# Altium PCB MB.PcbDoc
Units mil, origin at the board's own origin, x right, y up, seen from the top; angles counter-clockwise.
Board outline 4133.86 x 4881.89 mil, 4 copper layers (Top Layer, GND Layer, VCC Layer, Bottom Layer), stack 39.843 mil thick; 58 components, 76 nets, 347 pads, 2 vias.
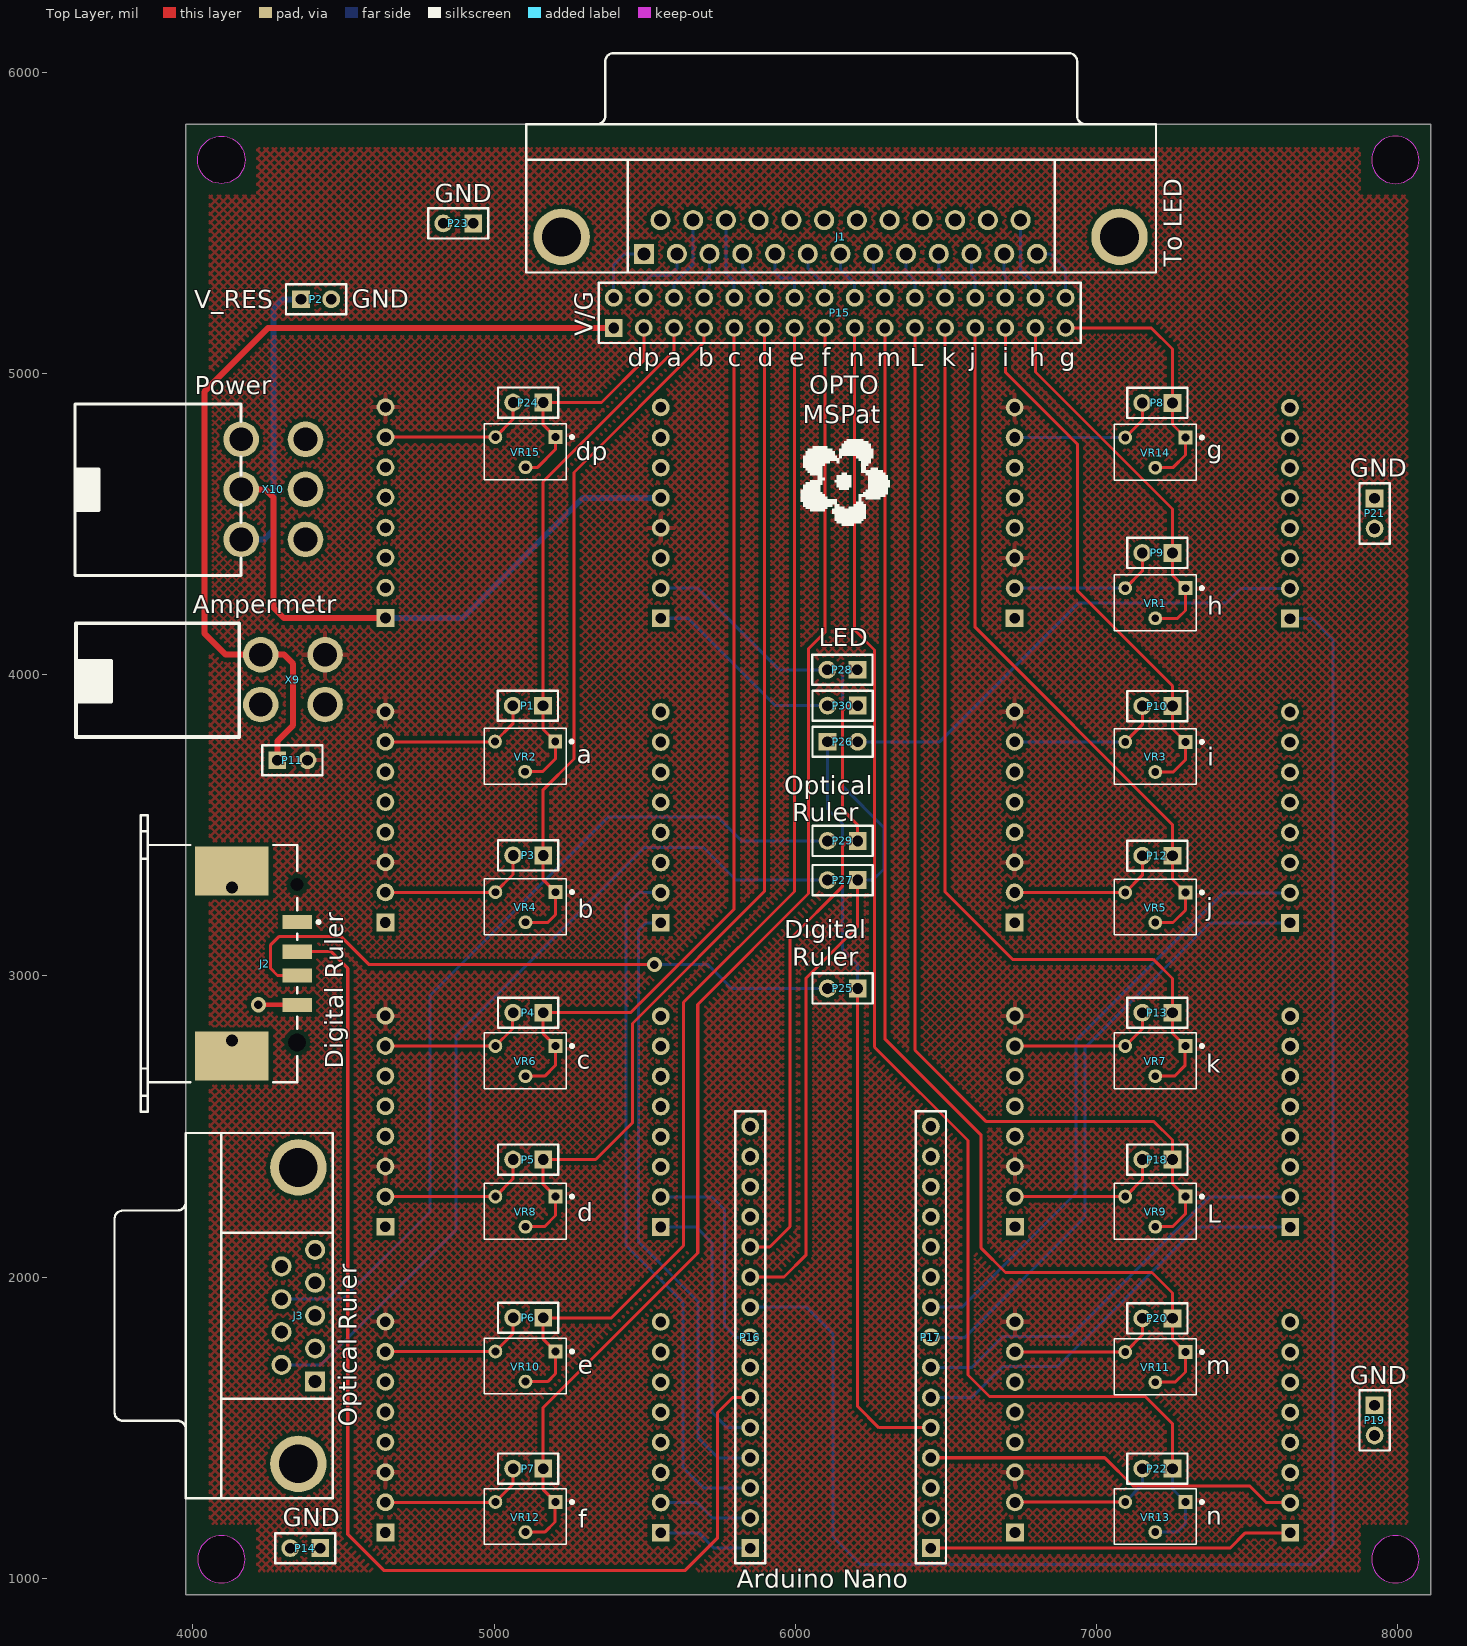
[diagram p0: Top Layer view]
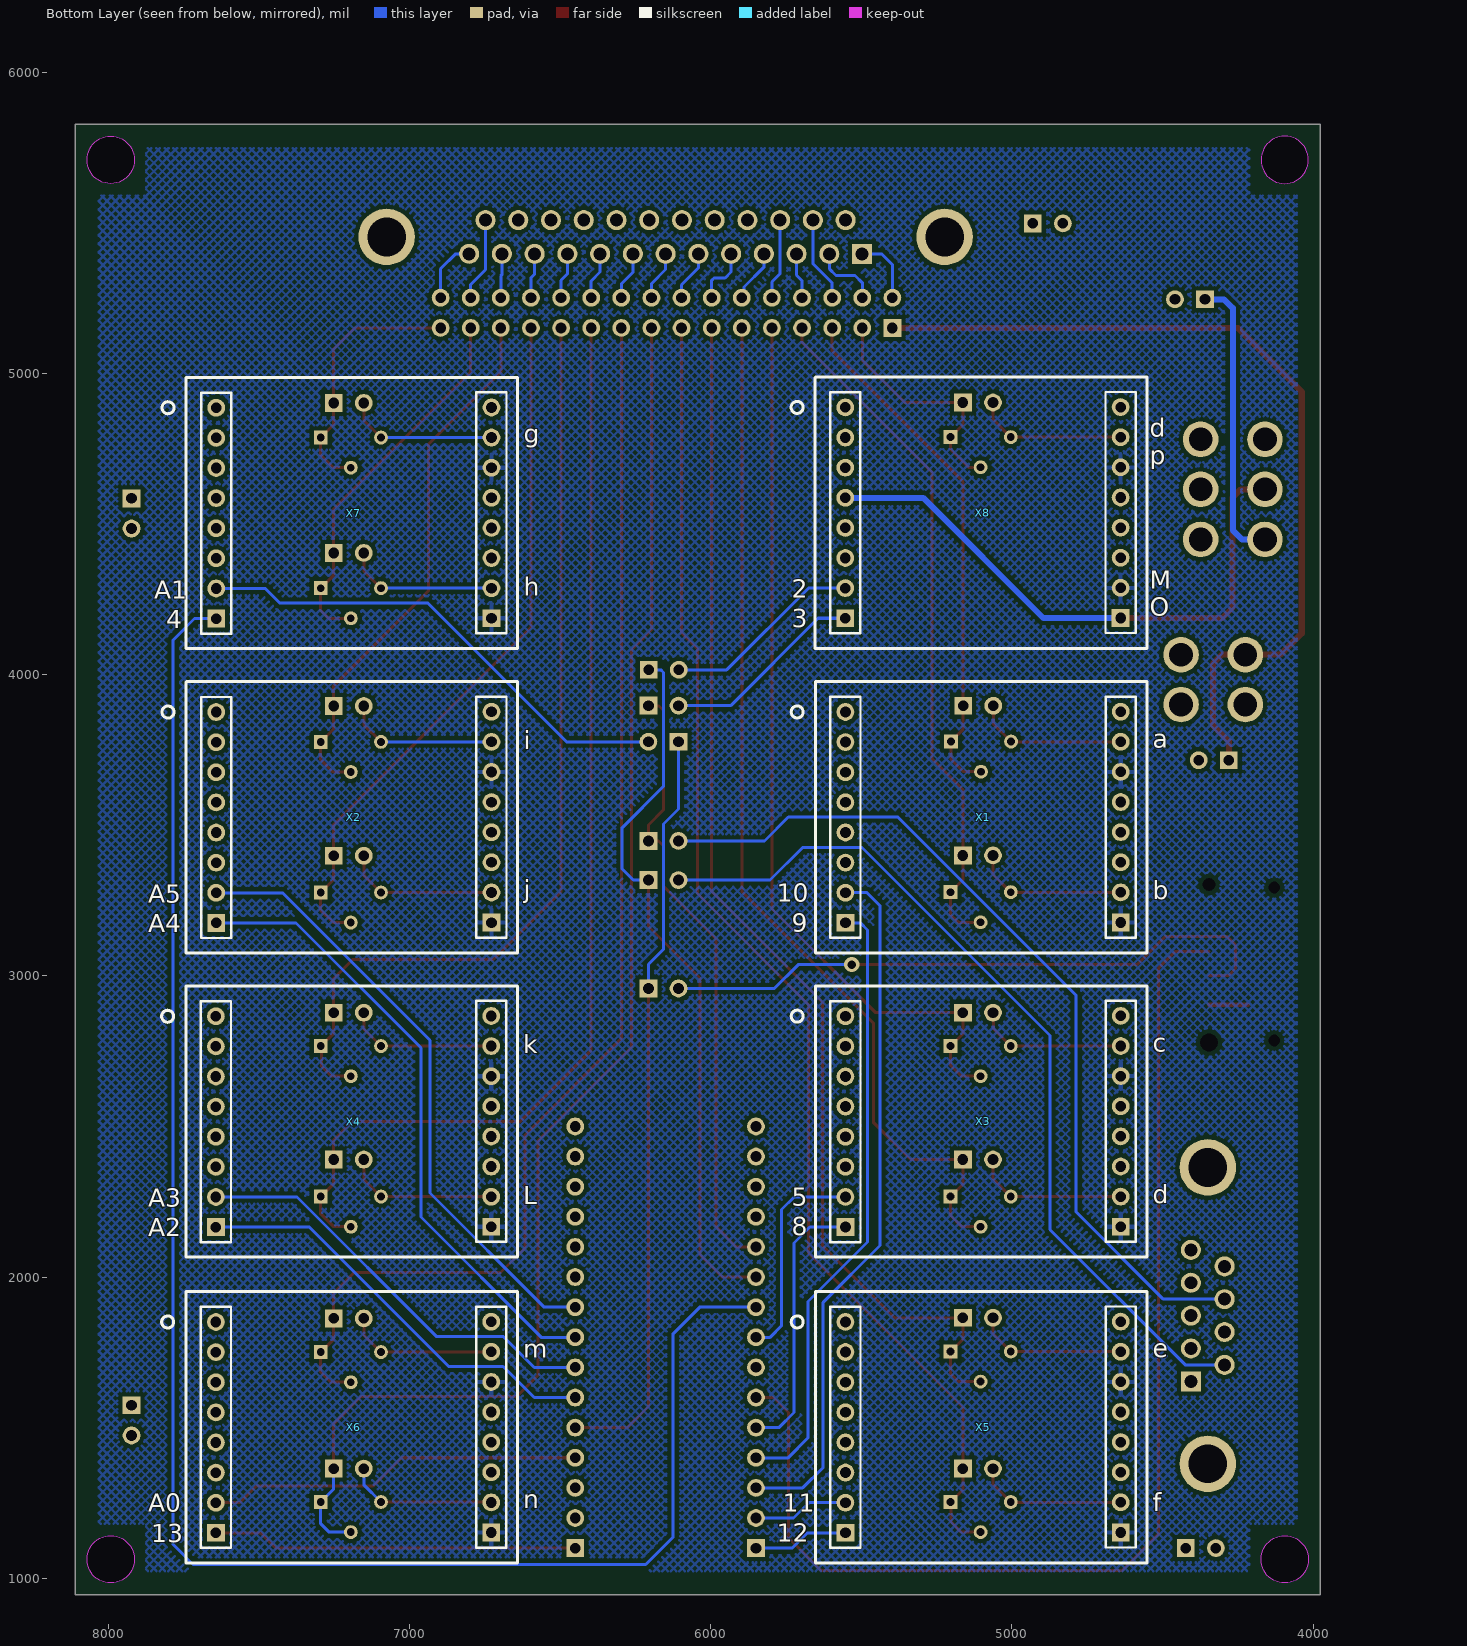
[diagram p1: Bottom Layer view, seen from below]
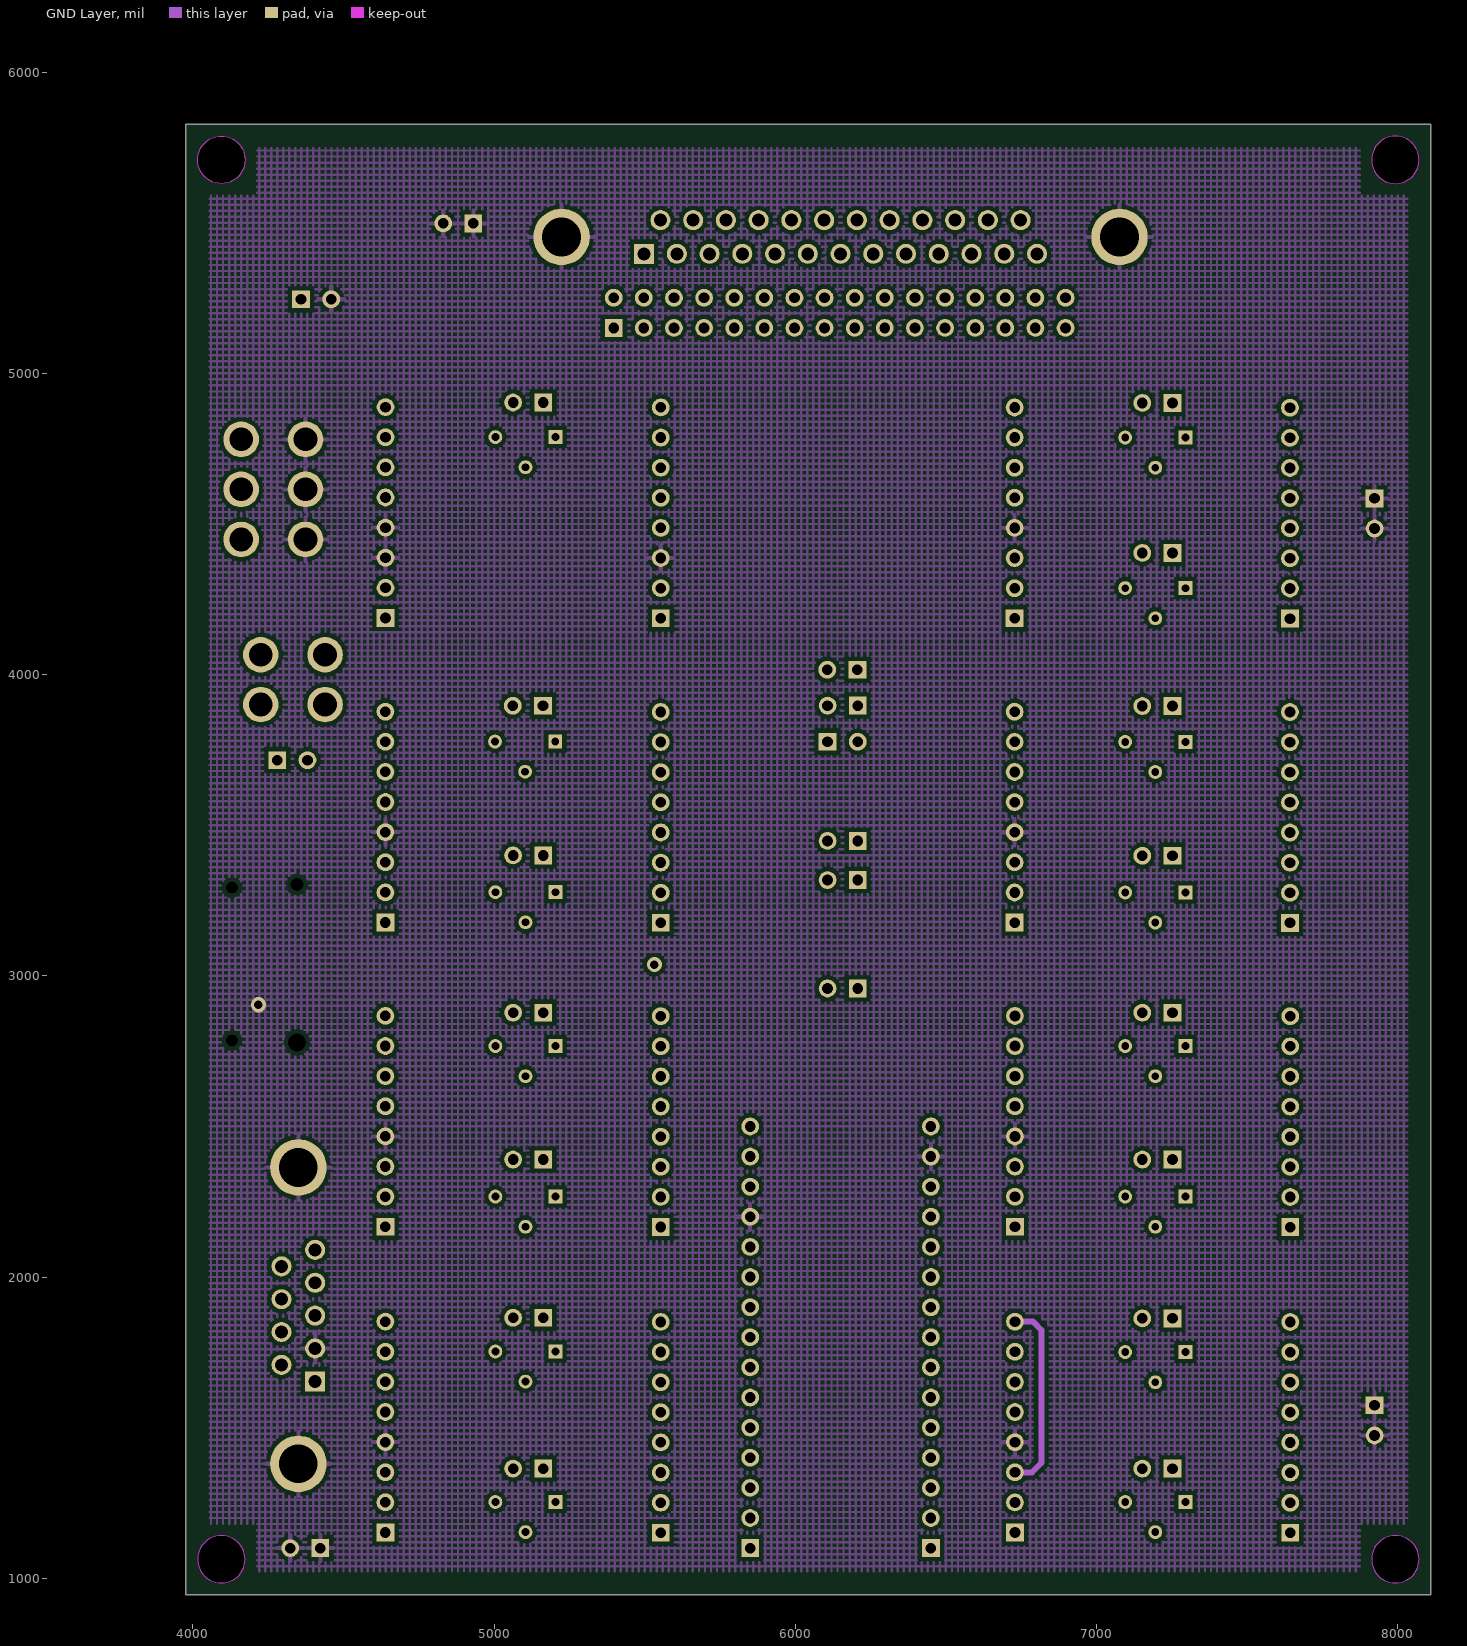
[diagram p2: GND Layer]
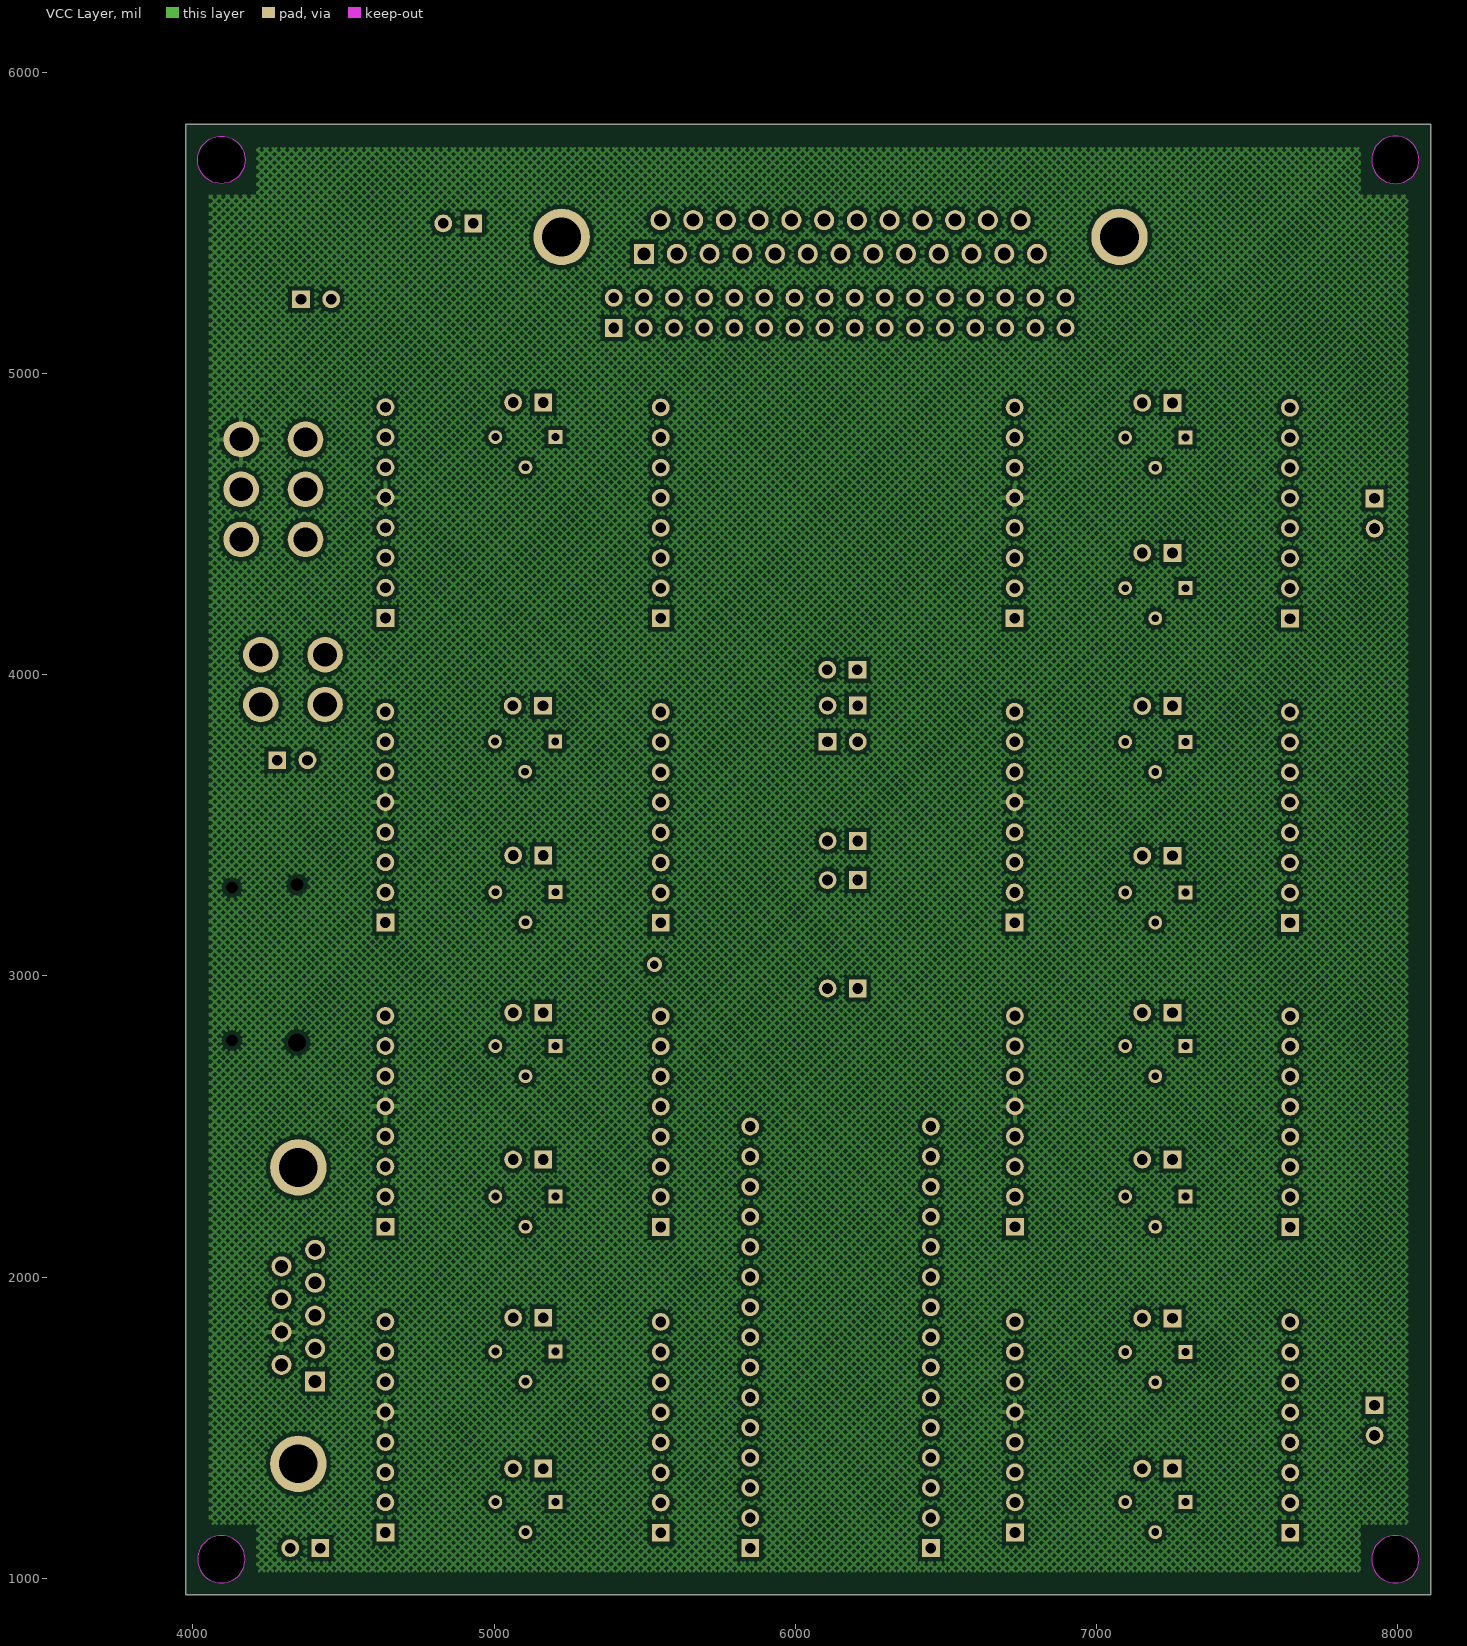
[diagram p3: VCC Layer]

## Layer stack, top to bottom
Top Solder: solder mask 1, SM-001, Dk 4
Top Layer: signal copper 0.7087
Dielectric 1: prepreg 4.5276, FR4 PR, Dk 4.2
GND Layer: signal copper 0.7087
Dielectric 2: core 27.9528, FR4 Tg150, Dk 4.6
VCC Layer: signal copper 0.7087
Dielectric 3: prepreg 4.5276, FR4 PR, Dk 4.2
Bottom Layer: signal copper 0.7087
Bottom Solder: solder mask 1, SM-001, Dk 4

## Board outline
3976.38,5826.77 8110.24,5826.77 8110.24,944.88 3976.38,944.88
cut-out: 7913.39,1062.99 ccw(c7992.13,1062.99) 7992.13,984.25 ccw(c7992.13,1062.99) 8070.87,1062.99 ccw(c7992.13,1062.99) 7992.13,1141.73 ccw(c7992.13,1062.99)
cut-out: 7913.39,5708.66 ccw(c7992.13,5708.66) 7992.13,5629.92 ccw(c7992.13,5708.66) 8070.87,5708.66 ccw(c7992.13,5708.66) 7992.13,5787.4 ccw(c7992.13,5708.66)
cut-out: 4094.49,5629.92 cw(c4094.49,5708.66) 4015.75,5708.66 cw(c4094.49,5708.66) 4094.49,5787.4 cw(c4094.49,5708.66) 4173.23,5708.66 cw(c4094.49,5708.66)
cut-out: 4015.75,1062.99 ccw(c4094.49,1062.99) 4094.49,984.25 ccw(c4094.49,1062.99) 4173.23,1062.99 ccw(c4094.49,1062.99) 4094.49,1141.73 ccw(c4094.49,1062.99)

## Design rules (kind name [scope] priority, off if disabled: settings)
AcuteAngle [All] p1: minimum=3.50000000000000E+0001 checktracksonly=FALSE
BoardOutlineClearance "BoardOutlineClearance 1" [All] p1: gap=9.84 ignorepadtopadclearanceinfootprint=FALSE except(0: Arc-SplitContinuation Track-SplitContinuation SMDPad-SplitContinuation THPad-SplitContinuation Via-SplitContinuation Fill-SplitContinuation Poly-SplitContinuation Region-SplitContinuation Text-SplitContinuation) // Milling
BoardOutlineClearance "BoardOutlineClearance 2" [All] p2: gap=15.75 ignorepadtopadclearanceinfootprint=FALSE except(0: Arc-SplitContinuation Track-SplitContinuation SMDPad-SplitContinuation THPad-SplitContinuation Via-SplitContinuation Fill-SplitContinuation Poly-SplitContinuation Region-SplitContinuation Text-SplitContinuation) // V-Cut
Clearance "Clearance 3 Oz" [All] p1: gap=13.78 ignorepadtopadclearanceinfootprint=FALSE except(9.84: Arc-Hole Track-Hole SMDPad-Hole THPad-Hole Via-Hole Fill-Hole Poly-Hole Region-Hole Text-Hole)
Clearance "Clearance 2 Oz" [All] p2: gap=11.81 ignorepadtopadclearanceinfootprint=FALSE except(9.84: Arc-Hole Track-Hole SMDPad-Hole THPad-Hole Via-Hole Fill-Hole Poly-Hole Region-Hole Text-Hole)
Clearance "Clearance-1 1 Oz" [All] p3: gap=7.87 ignorepadtopadclearanceinfootprint=FALSE except(9.84: Arc-Hole Track-Hole SMDPad-Hole THPad-Hole Via-Hole Fill-Hole Poly-Hole Region-Hole Text-Hole) // Standart
Clearance "Clearance-2 1 Oz" [All] p4: gap=5.91 ignorepadtopadclearanceinfootprint=FALSE except(7.87: Arc-Fill Arc-Poly Track-Fill Track-Poly SMDPad-Fill SMDPad-Poly THPad-Fill THPad-Poly Via-Fill Via-Poly Fill-Fill Fill-Poly Poly-Poly; 9.84: Arc-Hole Track-Hole SMDPad-Hole THPad-Hole Via-Hole Fill-Hole Poly-Hole Region-Hole Text-Hole) // Advance
Clearance "Clearance-1 1/2 Oz" [All] p5: gap=4.92 ignorepadtopadclearanceinfootprint=FALSE except(7.87: Arc-Fill Arc-Poly Track-Fill Track-Poly SMDPad-SMDPad SMDPad-Fill SMDPad-Poly THPad-Fill THPad-Poly Via-Fill Via-Poly Fill-Fill Fill-Poly Poly-Poly Poly-Region Poly-Text; 9.84: Arc-Hole Track-Hole SMDPad-Hole THPad-Hole Via-Hole Fill-Hole Poly-Hole Region-Hole Text-Hole) // Standart
Clearance "Clearance-2 1/2 Oz" [All] p6: gap=3.94 ignorepadtopadclearanceinfootprint=FALSE except(5.91: Arc-Fill Arc-Poly Track-Fill Track-Poly SMDPad-SMDPad SMDPad-Fill SMDPad-Poly THPad-Fill THPad-Poly Via-Fill Via-Poly Fill-Fill Fill-Poly Poly-Poly Poly-Region Poly-Text; 9.84: Arc-Hole Track-Hole SMDPad-Hole THPad-Hole Via-Hole Fill-Hole Poly-Hole Region-Hole Text-Hole) // Advance
DiffPairsRouting "DiffPairsRouting 1 Oz" [All] p1: maxlimit=10 minlimit=7.87 mostfreqgap=10 toplayer_minwidth=7.87 toplayer_maxwidth=15 toplayer_prefwidth=15 midlayer1_minwidth=7.87 midlayer1_maxwidth=15 midlayer1_prefwidth=15 midlayer2_minwidth=7.87 midlayer2_maxwidth=15 midlayer2_prefwidth=15 bottomlayer_minwidth=7.87 bottomlayer_maxwidth=15 bottomlayer_prefwidth=15 maxuncoupledlength=500
DiffPairsRouting "DiffPairsRouting 1/2 Oz" [All] p2: maxlimit=10 minlimit=3.94 mostfreqgap=10 toplayer_minwidth=3.94 toplayer_maxwidth=15 toplayer_prefwidth=15 midlayer1_minwidth=3.94 midlayer1_maxwidth=15 midlayer1_prefwidth=15 midlayer2_minwidth=3.94 midlayer2_maxwidth=15 midlayer2_prefwidth=15 bottomlayer_minwidth=3.94 bottomlayer_maxwidth=15 bottomlayer_prefwidth=15 maxuncoupledlength=500
HoleSize "Minimum HoleSize" [IsPad] p1: absolutevalues=TRUE maxlimit=232.28 minlimit=23.62 maxpercent=80.000 minpercent=20.000
HoleSize "Minimum HoleSize VIA 1" [IsVia] p2: absolutevalues=TRUE maxlimit=232.28 minlimit=11.81 maxpercent=80.000 minpercent=20.000 // Standart
HoleSize "Minimum HoleSize VIA 2" [IsVia] p3: absolutevalues=TRUE maxlimit=232.28 minlimit=7.87 maxpercent=80.000 minpercent=20.000 // Advance
HoleToHoleClearance Hole2HoleClearance [All] p1: gap=9.84 allowstackedmicrovias=FALSE
MinimumAnnularRing "Minimum AR VIA Standart" [IsVia] p1: minimumring=5.91
MinimumAnnularRing "Minimum AR PAD Standart" [IsPAD] p2: minimumring=7.87
MinimumAnnularRing "Minimum AR VIA Advance" [IsVia] p3: minimumring=3.94
MinimumAnnularRing "Minimum AR PAD Advance" [IsPAD] p4: minimumring=5.91
MinimumSolderMaskSliver "SolderMask Bridge Standart" [All] p1: minsoldermaskwidth=5.91 // All Masks
MinimumSolderMaskSliver "SolderMask Bridge Advance" [All] p2: minsoldermaskwidth=3.94 // Mask LDI
PlaneClearance "PlaneClearance 3 Oz" [All] p1: clearance=13.78
PlaneClearance "PlaneClearance 2 Oz" [All] p2: clearance=11.81
PlaneClearance "PlaneClearance 1 Oz" [All] p3: clearance=7.87
PlaneClearance "PlaneClearance-1 1/2 Oz" [All] p4: clearance=7.87 // Standart
PlaneClearance "PlaneClearance-2 1/2 Oz" [All] p5: clearance=5.91 // Advance
PlaneConnect "TermalConnect 3 Oz" [All] p1: planeconnectstyle=Relief reliefexpansion=7.87 reliefentries=4 reliefconductorwidth=13.78 reliefairgap=13.78 // Standart
PlaneConnect "TermalConnect 2 Oz" [All] p2: planeconnectstyle=Relief reliefexpansion=7.87 reliefentries=4 reliefconductorwidth=11.81 reliefairgap=11.81 // Standart
PlaneConnect "TermalConnect-1 1 Oz" [All] p3: planeconnectstyle=Relief reliefexpansion=7.87 reliefentries=4 reliefconductorwidth=7.87 reliefairgap=7.87 // Standart
PlaneConnect "TermalConnect-2 1 Oz" [All] p4: pad.planeconnectstyle=Relief pad.reliefexpansion=5.91 pad.reliefentries=4 pad.reliefconductorwidth=7.87 pad.reliefairgap=7.87 via.planeconnectstyle=Direct via.reliefexpansion=5.91 via.reliefentries=4 via.reliefconductorwidth=5.91 via.reliefairgap=5.91 // Advance
PlaneConnect "TermalConnect-1 1/2 Oz" [All] p5: planeconnectstyle=Relief reliefexpansion=7.87 reliefentries=4 reliefconductorwidth=7.87 reliefairgap=7.87 // Standart
PlaneConnect "TermalConnect-2 1/2 Oz" [All] p6: pad.planeconnectstyle=Relief pad.reliefexpansion=5.91 pad.reliefentries=4 pad.reliefconductorwidth=5.91 pad.reliefairgap=5.91 via.planeconnectstyle=Direct via.reliefexpansion=5.91 via.reliefentries=4 via.reliefconductorwidth=5.91 via.reliefairgap=5.91 // Advance
PolygonConnect "PolygonConnect 3 Oz" [All] p1: thpad.connectstyle=Relief thpad.reliefconductorwidth=13.78 thpad.reliefentries=4 thpad.polygonreliefangle="90 Angle" thpad.airgapwidth=13.78 smdpad.connectstyle=Relief smdpad.reliefconductorwidth=13.78 smdpad.reliefentries=4 smdpad.polygonreliefangle="90 Angle" smdpad.airgapwidth=13.78 via.connectstyle=Direct via.reliefconductorwidth=10 via.reliefentries=4 via.polygonreliefangle="90 Angle" via.airgapwidth=10
PolygonConnect "PolygonConnect 2 Oz" [All] p2: thpad.connectstyle=Relief thpad.reliefconductorwidth=11.81 thpad.reliefentries=4 thpad.polygonreliefangle="90 Angle" thpad.airgapwidth=11.81 smdpad.connectstyle=Relief smdpad.reliefconductorwidth=11.81 smdpad.reliefentries=4 smdpad.polygonreliefangle="90 Angle" smdpad.airgapwidth=11.81 via.connectstyle=Direct via.reliefconductorwidth=10 via.reliefentries=4 via.polygonreliefangle="90 Angle" via.airgapwidth=10
PolygonConnect "PolygonConnect-1 1 Oz" [All] p3: thpad.connectstyle=Relief thpad.reliefconductorwidth=7.87 thpad.reliefentries=4 thpad.polygonreliefangle="90 Angle" thpad.airgapwidth=7.87 smdpad.connectstyle=Relief smdpad.reliefconductorwidth=7.87 smdpad.reliefentries=4 smdpad.polygonreliefangle="90 Angle" smdpad.airgapwidth=7.87 via.connectstyle=Direct via.reliefconductorwidth=10 via.reliefentries=4 via.polygonreliefangle="90 Angle" via.airgapwidth=10 // Standart
PolygonConnect "PolygonConnect-2 1 Oz" [All] p4: thpad.connectstyle=Relief thpad.reliefconductorwidth=5.91 thpad.reliefentries=4 thpad.polygonreliefangle="90 Angle" thpad.airgapwidth=5.91 smdpad.connectstyle=Relief smdpad.reliefconductorwidth=5.91 smdpad.reliefentries=4 smdpad.polygonreliefangle="90 Angle" smdpad.airgapwidth=5.91 via.connectstyle=Direct via.reliefconductorwidth=10 via.reliefentries=4 via.polygonreliefangle="90 Angle" via.airgapwidth=10 // Advance
PolygonConnect "PolygonConnect-1 1/2 Oz" [All] p5: thpad.connectstyle=Relief thpad.reliefconductorwidth=5.91 thpad.reliefentries=4 thpad.polygonreliefangle="90 Angle" thpad.airgapwidth=7.87 smdpad.connectstyle=Relief smdpad.reliefconductorwidth=7.87 smdpad.reliefentries=4 smdpad.polygonreliefangle="90 Angle" smdpad.airgapwidth=7.87 via.connectstyle=Direct via.reliefconductorwidth=10 via.reliefentries=4 via.polygonreliefangle="90 Angle" via.airgapwidth=10 // Standart
PolygonConnect "PolygonConnect-2 1/2 Oz" [All] p6: thpad.connectstyle=Relief thpad.reliefconductorwidth=4.92 thpad.reliefentries=4 thpad.polygonreliefangle="90 Angle" thpad.airgapwidth=5.91 smdpad.connectstyle=Relief smdpad.reliefconductorwidth=4.92 smdpad.reliefentries=4 smdpad.polygonreliefangle="90 Angle" smdpad.airgapwidth=5.91 via.connectstyle=Direct via.reliefconductorwidth=10 via.reliefentries=4 via.polygonreliefangle="90 Angle" via.airgapwidth=10 // Advance
RoutingCorners [All] p1 off: cornerstyle=45-Degree minsetback=100 maxsetback=100
RoutingVias [All] p1: holewidth=11.81 width=23.62 viastyle="Through Hole" minholewidth=7.87 minwidth=15.75 maxholewidth=232.28 maxwidth=251.97
SilkToSilkClearance Silk2SilkClearance [All] p1 off: silktosilkclearance=5.91
SilkToSolderMaskClearance Silk2SolderMaskClearance [IsPad] p1 off: minsilkscreentomaskgap=5.91 clearancetoexposedcopper=TRUE
SolderMaskExpansion SolderMaskExpansion-1 [All] p1: expansion=1.97 istentingtop=FALSE // Standart
SolderMaskExpansion "SolderMaskExpansion LDI" [All] p2: expansion=0.98 istentingtop=FALSE // Advance
UnRoutedNet [All] p1: checkbadconnections=TRUE
Width "Width 3 Oz" [All] p1: maxlimit=20 minlimit=10 preferedwidth=10 checkconnectedcopper=TRUE
Width "Width 2 Oz" [All] p2: maxlimit=393.7 minlimit=10 preferedwidth=10 minimp=50.000000 maximp=50.000000 favimp=50.000000 checkconnectedcopper=TRUE
Width "Width 1 Oz" [All] p3: maxlimit=20 minlimit=10 preferedwidth=10 checkconnectedcopper=TRUE
Width "Width 1/2 Oz" [All] p4: maxlimit=20 minlimit=10 preferedwidth=10 checkconnectedcopper=TRUE
20 further rules are at their usual default settings.

## Components (designator, comment, footprint, x,y, rotation, side; value= is the part's Value field where it differs from the comment)
J1 "D Connector 25" DSUB1.385-2H25A 6150,5827 r0 top
J2 "1-353576-1" 353576 3849.94,3040.8 r180 top
J3 "D Connector 9" DSUB1.385-2H9 3975.98,1871.93 r90 top
P1 "Header 2" HDR1X2 5162,3896.75 r180 top
P2 "Header 2" HDR1X2 4359,5246 r0 top
P3 "Header 2" HDR1X2 5163,3399.75 r180 top
P4 "Header 2" HDR1X2 5163,2877.75 r180 top
P5 "Header 2" HDR1X2 5163,2390 r180 top
P6 "GND" HDR1X2 5163,1864.75 r180 top
P7 "GND" HDR1X2 5163,1364 r180 top
P8 "GND" HDR1X2 7252,4902 r180 top
P9 "GND" HDR1X2 7252,4404 r180 top
P10 "Header 2" HDR1X2 7252,3895.75 r180 top
P11 "Header 2" HDR1X2 4280.18,3716 r0 top
P12 "Header 2" HDR1X2 7252,3398.75 r180 top
P13 "GND" HDR1X2 7252,2877.75 r180 top
P14 "GND" HDR1X2 4423,1100 r180 top
P15 "Header 16X2" HDR2X16 5397,5151 r0 top
P16 "Header 15" HDR1X15 5850,1100 r90 top
P17 "Header 15" HDR1X15 6450,1100 r90 top
P18 "GND" HDR1X2 7252,2390 r180 top
P19 "GND" HDR1X2 7923,1574 r270 top
P20 "GND" HDR1X2 7252,1862.75 r180 top
P21 "GND" HDR1X2 7923,4585 r270 top
P22 "GND" HDR1X2 7252,1364 r180 top
P23 "GND" HDR1X2 4931,5498 r180 top
P24 "GND" HDR1X2 5163,4903.37 r180 top
P25 "Digit_rul" HDR1X2 6207,2958 r180 top
P26 "Relay" HDR1X2 6107,3777 r0 top
P27 "Optic_rul" HDR1X2 6207,3317.86 r180 top
P28 "Relay" HDR1X2 6206,4016 r180 top
P29 "Optic_ruler" HDR1X2 6207,3447.86 r180 top
P30 "Relay" HDR1X2 6207,3897 r180 top
VR1 "RES 3266W" "RES 3266W" 7295,4287 r180 top
VR2 "RES 3266W" "RES 3266W" 5203,3777.75 r180 top
VR3 "RES 3266W" "RES 3266W" 7295,3776.75 r180 top
VR4 "RES 3266W" "RES 3266W" 5204,3277.75 r180 top
VR5 "RES 3266W" "RES 3266W" 7295,3276.75 r180 top
VR6 "RES 3266W" "RES 3266W" 5204,2766.75 r180 top
VR7 "RES 3266W" "RES 3266W" 7295,2766.75 r180 top
VR8 "RES 3266W" "RES 3266W" 5204,2267 r180 top
VR9 "RES 3266W" "RES 3266W" 7295,2267 r180 top
VR10 "RES 3266W" "RES 3266W" 5204,1752.75 r180 top
VR11 "RES 3266W" "RES 3266W" 7295,1750.75 r180 top
VR12 "RES 3266W" "RES 3266W" 5204,1253 r180 top
VR13 "RES 3266W" "RES 3266W" 7295,1253 r180 top
VR14 "RES 3266W" "RES 3266W" 7295,4787 r180 top
VR15 "RES 3266W" "RES 3266W" 5204,4788.37 r180 top
X1 "MEZ_RELAY" MEZ_RELAY 5553,3876 r180 bottom
X2 "MEZ_RELAY" MEZ_RELAY 7642,3875.75 r180 bottom
X3 "MEZ_RELAY" MEZ_RELAY 5553,2866 r180 bottom
X4 "MEZ_RELAY" MEZ_RELAY 7643,2865.75 r180 bottom
X5 "MEZ_RELAY" MEZ_RELAY 5553,1851 r180 bottom
X6 "MEZ_RELAY" MEZ_RELAY 7643,1850.75 r180 bottom
X7 "MEZ_RELAY" MEZ_RELAY 7642,4886 r180 bottom
X8 "MEZ_RELAY" MEZ_RELAY 5553.36,4887.11 r180 bottom
X9 "Ampermetr" AMP_VOLTMETER 4438.69,4066 r270 top
X10 "Power" POWER 4160.18,4781 r90 top

## Footprints (in the part's own frame and the unit in brackets; to place one, negate y for a bottom-side part, rotate by r counter-clockwise, add the part's x,y. Pads: shape width x height; smd on the part's side, far side on the other; paste and mask are expansions set on the pad)
353576 [mm] "Connector; USB1.1, Type A, SM; 4 Position; Right Angle"
  rect 2.5x1.2 smd: 1(-12.6,-3.5) 2(-12.6,-1) 3(-12.6,1) 4(-12.6,3.5)
  rect 6.2x4.1 smd: 5(-7.1,7.8) 6(-7.1,-7.8)
  round 0.7 hole 1 unplated: MH1(-7.1,6.496) MH2(-7.1,-6.404)
  round 1.2 hole 1.5 unplated: MH3(-12.6,6.65)
  round 0.8 hole 1.1 unplated: MH4(-12.6,-6.65)
  silkscreen extent -14.53,-12.5 0.6,12.5
AMP_VOLTMETER [mm] "AMP_VOLTMETER"
  round 3 hole 2: 1(0,0) 2(0,-5.423) 3(4.2,-5.423) 4(4.2,0)
  silkscreen extent -2.66,-21 6.94,-7.25
DSUB1.385-2H9 [mm] "Connector; D Subminiature; 9 Position; Right Angle; Pitch 1.385 mm"
  rect 1.69x1.69 hole 1.09: 1(-5.54,-10.92)
  round 1.69 hole 1.09: 2(-2.77,-10.92) 3(0,-10.92) 4(2.77,-10.92) 5(5.54,-10.92) 6(-4.155,-8.08) 8(1.385,-8.08) 9(4.155,-8.08)
  round 1.69 hole 1.09 mask+0.102: 7(-1.385,-8.08)
  round 4.76 hole 3.26: 10(-12.495,-9.5) 11(12.495,-9.5)
  silkscreen extent -15.4,-12.4 15.4,6
DSUB1.385-2H25A [mm] "Connector; D Subminiature; 25 Position; Right Angle; Pitch 1.385 mm"
  rect 1.69x1.69 hole 1.09: 1(-16.566,-10.92)
  round 1.69 hole 1.09: 2(-13.805,-10.92) 3(-11.044,-10.92) 4(-8.283,-10.92) 5(-5.522,-10.92) 6(-2.761,-10.92) 7(0,-10.92) 8(2.761,-10.92) 9(5.522,-10.92) 10(8.283,-10.92) 11(11.044,-10.92) 12(13.805,-10.92) 13(16.566,-10.92) 14(-15.185,-8.08) 15(-12.424,-8.08) 16(-9.663,-8.08) 17(-6.902,-8.08) 18(-4.141,-8.08) 19(-1.38,-8.08) 20(1.381,-8.08) 21(4.142,-8.08) 22(6.903,-8.08) 23(9.664,-8.08) 24(12.425,-8.08) 25(15.186,-8.08)
  round 4.76 hole 3.26: 26(-23.526,-9.5) 27(23.526,-9.5)
  silkscreen extent -26.5,-12.5 26.6,6
HDR1X2 [mm] "Connector; Header; 2 Position"
  rect 1.5x1.5 hole 0.9: 1(0,0)
  round 1.5 hole 0.9: 2(2.54,0)
  silkscreen extent -1.27,-1.27 3.81,1.27
HDR1X15 [mm] "Connector; Header; 15 Position"
  rect 1.5x1.5 hole 0.9: 1(0,0)
  round 1.5 hole 0.9: 2(2.54,0) 3(5.08,0) 4(7.62,0) 5(10.16,0) 6(12.7,0) 7(15.24,0) 8(17.78,0) 9(20.32,0) 10(22.86,0) 11(25.4,0) 12(27.94,0) 13(30.48,0) 14(33.02,0) 15(35.56,0)
  silkscreen extent -1.27,-1.27 36.83,1.27
HDR2X16 [mm] "Connector; Header; 16x2 Position"
  rect 1.5x1.5 hole 0.9: 1(0,0)
  round 1.5 hole 0.9: 2(0,2.54) 3(2.54,0) 4(2.54,2.54) 5(5.08,0) 6(5.08,2.54) 7(7.62,0) 8(7.62,2.54) 9(10.16,0) 10(10.16,2.54) 11(12.7,0) 12(12.7,2.54) 13(15.24,0) 14(15.24,2.54) 15(17.78,0) 16(17.78,2.54) 17(20.32,0) 18(20.32,2.54) 19(22.86,0) 20(22.86,2.54) 21(25.4,0) 22(25.4,2.54) 23(27.94,0) 24(27.94,2.54) 25(30.48,0) 26(30.48,2.54) 27(33.02,0) 28(33.02,2.54) 29(35.56,0) 30(35.56,2.54) 31(38.1,0) 32(38.1,2.54)
  silkscreen extent -1.27,-1.27 39.37,3.81
MEZ_RELAY [mm] "мезонин реле"
  round 1.5 hole 0.9: 1(0,0) 2(0,-2.54) 3(0,-5.08) 4(0,-7.62) 5(0,-10.16) 6(0,-12.7) 7(0,-15.24) 10(23.216,-15.215) 11(23.216,-12.675) 12(23.216,-10.135) 14(23.216,-5.055) 15(23.216,-2.515) 16(23.216,0.025)
  rect 1.5x1.5 hole 0.9: 8(0,-17.78) 9(23.216,-17.755)
  round 1.5 hole 0.9 mask+0.102: 13(23.216,-7.595)
  silkscreen extent -4.57,-20.32 25.43,2.57
POWER [mm] "POWER"
  round 3 hole 2 mask+0.102: 1(0,0)
  round 3 hole 2: 2(-4.217,0) 3(-8.435,0) 4(0,-5.422) 5(-4.217,-5.422) 6(-8.435,-5.422)
  silkscreen extent -11.5,0 3,14
"RES 3266W" [mm]
  rect 1.168x1.168 hole 0.66: 1(0,0)
  round 1.168 hole 0.66: 2(2.54,2.54) 3(5.08,0)
  silkscreen extent -1.49,-1.12 5.99,3.58

## Part data
J1: "Receptacle Assembly, 25 Position, Right Angle", PackageDocument=U, DatasheetDocument=19-Mar-1999, Gender=Receptacle, LatestRevisionDate=17-Jul-2002, LatestRevisionNote="Re-released for DXP Platform.", Orientation="Right Angle", PackageReference=787202, Positions=25, Published=15-Jun-2001, Publisher="Altium Limited"
J2: "USB 1.1, Right Angle, SMT, A Type, Receptacle, 4 Position, White", PackageDocument=11-Apr-2003, ComponentLink1Description="Manufacturer Link", ComponentLink1URL=http://www.tycoelectronics.com/, ComponentLink2Description="Packaging Specification", ComponentLink2URL=http://ecommas.tycoelectronics.com/commerce/DocumentDelivery/DDEController?Action=showdoc&DocId=Customer+Drawing%7F353576%7FD%7Ftif%7FJapanese%7FJPN_CD_353576_D.tif, ContactMaterial="Copper Alloy", ContactPlating="Gold over Palladium Nickel", DatasheetDocument=11-Apr-2003, DrillSize="Corresponds to nominal value.", HousingMaterial=Thermoplastic, PackageReference=353576, PanelGround=Without, PCB_Layout="Complies with manufacturer's recommendation.", Published=15-Jul-2004, Publisher="Altium Limited"
J3: "Receptacle Assembly, 9 Position, Right Angle", PackageDocument=O, DatasheetDocument=1-Sep-1999, Gender=Receptacle, LatestRevisionDate=17-Jul-2002, LatestRevisionNote="Re-released for DXP Platform.", Orientation="Right Angle", PackageReference=788750, Positions=9, Published=15-Jun-2001, Publisher="Altium Limited"
P1 P2 P3 P4 P5 P10 P11 P12: "Header, 2-Pin", LatestRevisionDate=17-Jul-2002, LatestRevisionNote="Re-released for DXP Platform.", Publisher="Altium Limited"
P6 P7 P8 P9 P13 P14 P18 P19 P20 P21 P22 P23 P24 P25 P26 P27 P28 P29 P30: library part "Header 2", "Header, 2-Pin", LatestRevisionDate=17-Jul-2002, LatestRevisionNote="Re-released for DXP Platform.", Publisher="Altium Limited"
P15: "Header, 16-Pin, Dual row", LatestRevisionDate=17-Jul-2002, LatestRevisionNote="Re-released for DXP Platform.", Publisher="Altium Limited"
P16 P17: "Header, 15-Pin", LatestRevisionDate=17-Jul-2002, LatestRevisionNote="Re-released for DXP Platform.", Publisher="Altium Limited"
X9: library part AMP_VOLTMETR
X10: library part POWER

## Via types
v1: diameter 50, hole 28, Top Layer to Bottom Layer, 1 vias
v2: diameter 50, hole 28, Top Layer to GND Layer, 1 vias

## Nets (pads, with @x,y where several pads share a name; then routed paths per layer and width w, separated by ;. In a path a pad name is that pad's centre, name@x,y a point inside that pad or via, vN(x,y) a via of type N, cw(c..) or ccw(c..) an arc to the next point about the centre after c; other vN are vias at no path point)
a: P1.2 VR2.3 X1.15 | length 507.4
  Top Layer w10: X1.15 VR2.3@5003,3777 ; VR2.3 5062,3836.75 P1.2
A0: P17.4 X6.7 | length 1254.9
  Top Layer w10: P17.4 6450.06,1400.06 7026.94,1400.06 7121,1306 7509,1306 7564.25,1250.75 X6.7
A1: P17.5 P25.1 P26.1 | length 2520.4
  Top Layer w10: P25.1 6207,1570 6277,1500 P17.5
  Bottom Layer w10: P26.1 6107,3554 6157,3504 6157,3088 6207,3038 P25.1
A1_relay: P26.2 X7.7 | length 1645.8
  Bottom Layer w10: P26.2 6479,3777 6939,4237 7430,4237 7479,4286 X7.7
A1_ruler: J2.3 P25.2 | length 2107.8
  Top Layer w10: J2.3 4280.57,3001.43 4258,3024 4258,3103 4285,3130 4492,3130 4585,3037 v1(5532,3037)
  Bottom Layer w10: v1(5532,3037) 5710,3037 5789,2958 P25.2
A2: P17.6 X4.8 | length 1427.3
  Bottom Layer w10: P17.6 6586,1600 6689,1703 6870,1703 7332.75,2165.75 X4.8
A3: P17.7 X4.7 | length 1427.3
  Bottom Layer w10: P17.7 6586,1700 6688,1802 6910,1802 7373.75,2265.75 X4.7
A4: P17.8 X2.8 | length 2091.1
  Bottom Layer w10: P17.8 6563,1800 6962,2199 6962,2761 7376.75,3175.75 X2.8
A5: P17.9 X2.7 | length 2058.8
  Bottom Layer w10: P17.9 6553,1900 6932,2279 6932,2786 7421.75,3275.75 X2.7
a_00: J1.15 P15.6 | length 284.3
  Bottom Layer w10: P15.6 5597,5300 5660.85,5363.85 J1.15
a_0: P1.1 P15.5 VR2.1 VR2.2 | length 1745.7
  Top Layer w10: VR2.2 5160.75,3677.75 5203,3720 VR2.1 5162,3818.75 P1.1 5162,4640 5597,5075 P15.5
b: P3.2 VR4.3 X1.10 | length 511.4
  Top Layer w10: X1.10 VR4.3@5004,3277 ; VR4.3 5063,3336.75 P3.2
b_00: J1.3 P15.8 | length 153.6
  Bottom Layer w10: P15.8 5697,5308 5715.2,5326.2 J1.3
b_0: P3.1 P15.7 VR4.1 VR4.2 | length 2296.6
  Top Layer w10: VR4.2 5178.75,3177.75 5204,3203 VR4.1 5163,3318.75 P3.1 5163,3618 5265,3720 5265,4671 5697,5103 P15.7
c: P4.2 VR6.3 X3.15 | length 500.4
  Top Layer w10: X3.15 VR6.3@5004,2767 ; VR6.3 5060.74,2823.48 5060.74,2875.48 P4.2
c_00: J1.16 P15.10 | length 269.3
  Bottom Layer w10: J1.16 5769.55,5331.45 5797,5304 P15.10
c_0: P4.1 P15.9 VR6.1 VR6.2 | length 3012.3
  Top Layer w10: VR6.2 5167.75,2666.75 5204,2703 VR6.1 5163,2807.75 P4.1 5452.75,2877.75 5797,3222 P15.9
d: P5.2 VR8.3 X3.10 | length 512.4
  Top Layer w10: X3.10 VR8.3 5063,2326 P5.2
D2: P16.11 P29.1 P30.1 | length 2062.3
  Top Layer w10: P16.11 5915,2100 5982,2167 5982,3122 6157,3297 6157,3431 6173.86,3447.86 P29.1 6207,3501 6157,3551 6157,3881 6172,3896 P30.1@6206,3896
D2_relay: P30.2 X8.8 | length 673.8
  Bottom Layer w10: X8.8 5643.89,4187.11 5934,3897 P30.2
D2_ruler: J3.8 P29.2 | length 2929.8
  Bottom Layer w10: J3.8 4497.46,1926.46 4787,2216 4787,2935 5379,3527 5742.72,3527 5821.86,3447.86 P29.2
D3: P16.10 P27.1 P28.1 | length 2395.3
  Top Layer w10: P16.10 5962,2000 6036,2074 6036,2993 6207,3164 P27.1
  Bottom Layer w10: P28.1 6166,4016 6157,4007 6157,3629 6294,3492 6294,3354.86 6257,3317.86 P27.1
D3_relay: P28.2 X8.7 | length 664.9
  Bottom Layer w10: X8.7 5675.89,4287.11 5947,4016 P28.2
D3_ruler: J3.6 P27.2 | length 2946.8
  Bottom Layer w10: J3.6 4424.98,1708.35 4874,2157.36 4874,2802 5498,3426 5695,3426 5803.14,3317.86 P27.2
D4: P16.9 X7.8 | length 5886.9
  Bottom Layer w10: P16.9 6037,1900 6125,1812 6125,1137 6216,1046 7719,1046 7785,1112 7785,4115 7714,4186 X7.8
D5: P16.8 X3.7 | length 716.1
  Bottom Layer w10: X3.7 5723,2266 5765,2224 5765,1838 5803,1800 P16.8
D7: J2.2 P16.6 | length 3937.8
  Top Layer w10: J2.2 4458.83,3080.17 4514,3025 4514,1146 4635,1025 5633,1025 5742,1134 5742,1550 5792,1600 P16.6
D8: P16.5 X3.8 | length 902.7
  Bottom Layer w10: X3.8 5671,2166 5724,2113 5724,1550 5774,1500 P16.5
D9: P16.4 X1.8 | length 2050.9
  Bottom Layer w10: X1.8 5504,3176 5480,3152 5480,2116 5677,1919 5677,1466 5743,1400 P16.4
D10: P16.3 X1.7 | length 2327.3
  Bottom Layer w10: X1.7 5481,3276 5438,3233 5438,2105 5627,1916 5627,1368 5695,1300 P16.3
D11: P16.2 X5.7 | length 318.1
  Bottom Layer w10: X5.7 5674,1251 5725,1200 P16.2
D12: P16.1 X5.8 | length 318.1
  Bottom Layer w10: X5.8 5679,1151 5730,1100 P16.1
D13: P17.1 X6.8 | length 1214
  Top Layer w10: P17.1 7443,1100 7493.75,1150.75 X6.8
d_00: J1.4 P15.12 | length 176.4
  Bottom Layer w10: J1.4 5823.9,5352.1 5889.51,5286.49 5889.51,5258.49 P15.12
d_0: P5.1 P15.11 VR8.1 VR8.2 | length 3485.3
  Top Layer w10: VR8.2 5167,2167 5204,2204 VR8.1 5163,2308 P5.1 5337,2390 5459,2512 5459,2842 5897,3280 P15.11
dp: P24.2 VR15.3 X8.15 | length 504.1
  Top Layer w10: X8.15 VR15.3@5004,4788.11 ; VR15.3 5063,4847.37 P24.2
dp_00: J1.2 P15.4 | length 228.3
  Bottom Layer w10: P15.4 5497,5301 5521,5325 5584,5325 5606.5,5347.5 J1.2
dp_0: P15.3 P24.1 VR15.1 VR15.2 | length 796.3
  Top Layer w10: VR15.2 5144.37,4688.37 5204,4748 VR15.1 5163,4829.37 P24.1 5356.37,4903.37 5497,5044 P15.3
e: P6.2 VR10.3 X5.15 | length 501.4
  Top Layer w10: X5.15 VR10.3@5004,1752 ; VR10.3 5063,1811.75 P6.2
e_00: J1.5 P15.14 | length 194.4
  Bottom Layer w10: J1.5 5932.6,5336.4 5952,5317 5989,5317 5997,5309 P15.14
e_0: P6.1 P15.13 VR10.1 VR10.2 | length 4078.1
  Top Layer w10: VR10.2 5177.75,1652.75 5204,1679 VR10.1 5163,1793.75 P6.1 5389.75,1864.75 5629,2104 5629,2912 5997,3280 P15.13
f: P7.2 VR12.3 X5.10 | length 500.4
  Top Layer w10: X5.10 VR12.3@5004,1252 ; VR12.3 5063,1312 P7.2
f_00: J1.6 P15.16 | length 169.2
  Bottom Layer w10: J1.6 6041.3,5349.7 6097,5294 P15.16
f_0: P7.1 P15.15 VR12.1 VR12.2 | length 4481.2
  Top Layer w10: VR12.2 5168,1153 5202,1187 5202,1251 VR12.1 5163,1294 P7.1 5163,1567 5676,2080 5676,2905 6044,3273 6044,4086 6098,4140 P15.15@6098,5151
g: P8.2 VR14.3 X7.15 | length 505.6
  Top Layer w10: VR14.3 7152,4844 P8.2
  Bottom Layer w10: X7.15 VR14.3
g_00: J1.13 P15.32 | length 211.5
  Bottom Layer w10: J1.13 6846.92,5397.08 6897,5347 P15.32
g_0: P8.1 P15.31 VR14.1 VR14.2 | length 871.2
  Top Layer w10: P15.31 7182,5151 7252,5081 P8.1 7252,4830 VR14.1 7295,4729 7253,4687 VR14.2
GND: J1.26 J1.27 J2.4 J3.2 J3.10 J3.11 P2.2 P14.1 P14.2 P16.12 P17.14 P19.1 P19.2 P21.1 P21.2 P23.1 P23.2 X1.12 X2.12 X3.12 X4.12 X5.12 X6.12 X7.12 X8.6 X8.11 X8.12 X10.4 X10.5 X10.6 | length 128
  Top Layer w15.75: v2(4217,2904) J2.4@4345,2904
h: P9.2 VR1.3 X7.10 | length 507.6
  Top Layer w10: VR1.3 7152,4344 P9.2
  Bottom Layer w10: X7.10 VR1.3
h_00: J1.25 P15.30 | length 278.2
  Bottom Layer w10: J1.25 6747.85,5344.15 6797,5295 P15.30
h_0: P9.1 P15.29 VR1.1 VR1.2 | length 1255
  Top Layer w10: P15.29 6797,5005 7252,4550 P9.1 7252,4330 VR1.1 7295,4213 7269,4187 VR1.2
i: P10.2 VR3.3 X2.15 | length 509.6
  Top Layer w10: VR3.3 7152,3833.75 P10.2
  Bottom Layer w10: X2.15 VR3.3
i_00: J1.12 P15.28 | length 147.5
  Bottom Layer w10: J1.12 6693.5,5327.5 6697,5324 P15.28
i_0: P10.1 P15.27 VR3.1 VR3.2 | length 1798.4
  Top Layer w10: P15.27 6697,5005 6937,4765 6937,4278 7252,3963 P10.1 7252,3819.75 VR3.1 7295,3717 7254.75,3676.75 VR3.2
j: P12.2 VR5.3 X2.10 | length 512.6
  Top Layer w10: X2.10 VR5.3 7152,3333.75 P12.2
j_00: J1.11 P15.26 | length 151.1
  Bottom Layer w10: J1.11 6584.8,5330.2 6597,5318 P15.26
j_0: P12.1 P15.25 VR5.1 VR5.2 | length 2339.2
  Top Layer w10: P15.25 6597,4157 7252,3502 P12.1 7252,3319.75 VR5.1 7295,3218 7253.75,3176.75 VR5.2
k: P13.2 VR7.3 X4.15 | length 500.6
  Top Layer w10: X4.15 VR7.3 7152,2823.75 P13.2
k_00: J1.10 P15.24 | length 154.7
  Bottom Layer w10: J1.10 6476.1,5329.9 6497,5309 P15.24
k_0: P13.1 P15.23 VR7.1 VR7.2 | length 3167.1
  Top Layer w10: P15.23 6497,3279 6721,3055 7188,3055 7252,2991 P13.1 7252,2809.75 VR7.1 7293,2764.75 7293,2701 7258.75,2666.75 VR7.2
l: P18.2 VR9.3 X4.10 | length 512.9
  Top Layer w10: X4.10 VR9.3@7094.37,2266.75 ; VR9.3@7094.37,2267.37 VR9.3@7095,2268 ; VR9.3 7152,2324 P18.2
l_00: J1.9 P15.22 | length 158.3
  Bottom Layer w10: J1.9 6367.4,5336.6 6397,5307 P15.22
l_0: P15.21 P18.1 VR9.1 VR9.2 | length 3757.1
  Top Layer w10: P15.21 6397,2753 6634,2516 7191,2516 7252,2455 P18.1 7252,2310 VR9.1 7295,2210 7252,2167 VR9.2
m: P20.2 VR11.3 X6.15 | length 501.6
  Top Layer w10: X6.15 VR11.3@7095,1751.75 ; VR11.3 7152,1807.75 P20.2
m_00: J1.8 P15.20 | length 161.9
  Bottom Layer w10: J1.8 6258.7,5335.3 6297,5297 P15.20
m_0: P15.19 P20.1 VR11.1 VR11.2 | length 4278.3
  Top Layer w10: P15.19 6297,2791 6617,2471 6617,2096 6698,2015 7184,2015 7252,1947 P20.1 7252,1793.75 VR11.1 7295,1685 7260.75,1650.75 VR11.2
MASTER_OUT: X1.9 X1.14 X2.9 X2.14 X3.9 X3.14 X4.9 X4.14 X5.9 X5.14 X6.9 X6.14 X7.9 X7.14 X8.10 X8.14
n: P22.2 VR13.3 X6.10 | length 499.4
  Top Layer w10: X6.10@6729.63,1252.37 VR13.3@7094.37,1252.37
  Bottom Layer w10: VR13.3 7152,1310 P22.2
n_00: J1.7 P15.18 | length 165.5
  Bottom Layer w10: J1.7 6150,5345 6197,5298 P15.18
n_0: P15.17 P22.1 VR13.1 VR13.2 | length 4839.3
  Top Layer w10: P15.17 6197,4148 6263,4082 6263,2763 6573,2453 6573,1675 6644.56,1603.44 7161.56,1603.44 7252,1513 P22.1
  Bottom Layer w10: VR13.2 7267,1153 7295,1181 VR13.1 7252,1296 P22.1
V/G_FROM_A: P11.2 X1.11 X1.16 X2.11 X2.16 X3.11 X3.16 X4.11 X4.16 X5.11 X5.16 X6.11 X6.16 X7.11 X7.16 X8.5 X8.16 X9.1 | length 641.2
  GND Layer w20: X6.11 6785.75,1351.75 6816.75,1382.75 6816.75,1824.25 6789.25,1851.75 X6.16
V/G_TO_A: P11.1 P15.1 X9.2 | length 2927.5
  Top Layer w20: P11.1 4280.18,3779.18 4333,3832 4333,4036 4303,4066 X9.2 4109,4066 4038,4137 4038,4939 4250,5151 P15.1
V/G_TO_A_0: J1.1 P15.2 | length 225.7
  Bottom Layer w10: P15.2 5397,5361 5433.08,5397.08 J1.1
V_LED: X8.4 X8.9 X10.2 | length 1949.1
  Top Layer w20: X10.2 4240.04,4614.96 4267.14,4587.86 4267.14,4222.86 4301.89,4188.11 X8.9
  Bottom Layer w20: X8.9 4896.11,4188.11 5295.11,4587.11 X8.4
V_MB: J3.7 X1.13 X2.13 X3.13 X4.13 X5.13 X6.13 X7.13 X8.13 X10.1
V_RESERVE: P2.1 X10.3 | length 961.1
  Bottom Layer w20: X10.3 4236.91,4448.91 4267,4479 4267,5216.7 4296.3,5246 P2.1
pads on no net: J1.14 J1.17 J1.18 J1.19 J1.20 J1.21 J1.22 J1.23 J1.24 J2.1 J2.5 J2.6 J2.MH1 J2.MH2 J2.MH3 J2.MH4 J3.1 J3.3 J3.4 J3.5 J3.9 P16.7 P16.13 P16.14 P16.15 P17.2 P17.3 P17.10 P17.11 P17.12 P17.13 P17.15 X1.1 X1.2 X1.3 X1.4 X1.5 X1.6 X2.1 X2.2 X2.3 X2.4 X2.5 X2.6 X3.1 X3.2 X3.3 X3.4 X3.5 X3.6 X4.1 X4.2 X4.3 X4.4 X4.5 X4.6 X5.1 X5.2 X5.3 X5.4 X5.5 X5.6 X6.1 X6.2 X6.3 X6.4 X6.5 X6.6 X7.1 X7.2 X7.3 X7.4 X7.5 X7.6 X8.1 X8.2 X8.3 X9.3 X9.4

## Polygon pours and split planes (outlines as drawn)
V_MB on VCC Layer "V_MB_L03_P000" (hatched 45Degree grid 20 track 8, remove dead copper, pour order 0): 4055.12,5748.03 8031.5,5748.03 8031.5,1023.62 4055.12,1023.62
V/G_FROM_A on Top Layer "V/G_FROM_A_L01_P002" (hatched 45Degree grid 20 track 8, remove dead copper, pour order 2): 4055.12,5748.03 8031.5,5748.03 8031.5,1023.62 4055.12,1023.62
MASTER_OUT on Bottom Layer "MASTER_OUT_L04_P003" (hatched 45Degree grid 20 track 8, remove dead copper, pour order 3): 4055.12,5748.03 8031.5,5748.03 8031.5,1023.62 4055.12,1023.62
GND on GND Layer "GND_L02_P001" (hatched 90Degree grid 20 track 8, remove dead copper, pour order 1): 4055.12,5748.03 8031.5,5748.03 8031.5,1023.62 4055.12,1023.62

## Other copper
Top Layer:
  pour cut-out: 8110.24,5826.77 7874.02,5826.77 7874.02,5590.55 8110.24,5590.55
  pour cut-out: 3976.38,5826.77 4212.6,5826.77 4212.6,5590.55 3976.38,5590.55
  pour cut-out: 3976.38,944.88 3976.38,1181.1 4212.6,1181.1 4212.6,944.88
  pour cut-out: 8110.24,944.88 8110.24,1181.1 7874.02,1181.1 7874.02,944.88
GND Layer:
  pour cut-out: 3976.38,1181.1 4212.6,1181.1 4212.6,944.88 3976.38,944.88
  pour cut-out: 7874.02,1181.1 8110.24,1181.1 8110.24,944.88 7874.02,944.88
  pour cut-out: 8110.24,5826.77 7874.02,5826.77 7874.02,5590.55 8110.24,5590.55
  pour cut-out: 3976.38,5826.77 4212.6,5826.77 4212.6,5590.55 3976.38,5590.55
VCC Layer:
  pour cut-out: 3976.38,1181.1 4212.6,1181.1 4212.6,944.88 3976.38,944.88
  pour cut-out: 7874.02,1181.1 8110.24,1181.1 8110.24,944.88 7874.02,944.88
  pour cut-out: 7874.02,5826.77 8110.24,5826.77 8110.24,5590.55 7874.02,5590.55
  pour cut-out: 3976.38,5826.77 4212.6,5826.77 4212.6,5590.55 3976.38,5590.55
Bottom Layer:
  pour cut-out: 3976.38,1181.1 4212.6,1181.1 4212.6,944.88 3976.38,944.88
  pour cut-out: 3976.38,5826.77 4212.6,5826.77 4212.6,5590.55 3976.38,5590.55
  pour cut-out: 7874.02,5826.77 8110.24,5826.77 8110.24,5590.55 7874.02,5590.55
  pour cut-out: 7874.02,1181.1 8110.24,1181.1 8110.24,944.88 7874.02,944.88

## Silkscreen, mask and mechanical layers (free items; w line width, h text height)
Top Overlay:
  drawing of 2 lines, arcs and shapes, not listed
  text "To LED" at 7283.46,5354.33 h60 r90
  text "GND" at 4528,5218 h60
  text "V_RES" at 4005,5216 h60
  text "V/G" at 5327,5123 h60 r90
  text "dp" at 5443,5024 h60
  text "a" at 5573,5024 h60
  text "b" at 5678,5024 h60
  text "c" at 5775.04,5024.01 h60
  text "d" at 5875.04,5024.01 h60
  text "e" at 5979.04,5024.01 h60
  text "f" at 6088,5024 h60
  text "n" at 6177,5024 h60
  text "m" at 6271,5024 h60
  text "L" at 6379,5024 h60
  text "k" at 6486,5024 h60
  text "i" at 6687,5024 h60
  text "h" at 6777,5024 h60
  text "g" at 6877,5024 h60
  text "j" at 6577,5023 h60
  text "OPTO" at 6046,4933 h60
  text "MSPat" at 6025,4834 h60
  text "g" at 7366,4716 h60
  text "dp" at 5271,4711.37 h60
  text "h" at 7367,4198 h60
  text "LED" at 6078,4094 h60
  text "a" at 5275,3706 h60
  text "i" at 7367,3698 h60
  text "Optical /  Ruler" at 5963,3513 h60
  text "j" at 7365,3198 h60
  text "b" at 5277,3193 h60
  text "Digital /  Ruler" at 5963,3034 h60
  text "c" at 5275,2692 h60
  text "Digital Ruler" at 4499,2691 h60 r90
  text "k" at 7364,2678 h60
  text "d" at 5276,2186 h60
  text "L" at 7367,2180 h60
  text "e" at 5277,1679 h60
  text "m" at 7365,1677 h60
  text "Optical Ruler" at 4544,1503 h60 r90
  text "n" at 7364,1177 h60
  text "f" at 5279,1167 h60
  text "Arduino Nano" at 5806,969 h60
Bottom Overlay:
  text "g" at 6621,4770 h60
  text "d / p" at 4542.36,4699.11 h60
  text "h" at 6621,4261 h60
  text "2" at 5731,4256 h60
  text "A1" at 7847.01,4252 h60
  text "M / O" at 4542.36,4195.11 h60
  text "3" at 5731,4157 h60
  text "4" at 7807.02,4154 h60
  text "a" at 4532,3757 h60
  text "i" at 6621,3752.75 h60
  text "j" at 6621,3256.75 h60
  text "b" at 4532,3255 h60
  text "10" at 5780.98,3246 h60
  text "A5" at 7867,3243 h60
  text "9" at 5731,3146 h60
  text "A4" at 7867,3145 h60
  text "c" at 4532,2748 h60
  text "k" at 6622,2743.75 h60
  text "d" at 4532,2245 h60
  text "L" at 6622,2241.75 h60
  text "5" at 5731,2237 h60
  text "A3" at 7867,2234 h60
  text "8" at 5731,2138 h60
  text "A2" at 7867,2136 h60
  text "e" at 4532,1733 h60
  text "m" at 6622,1731.75 h60
  text "n" at 6622,1232.75 h60
  text "f" at 4532,1222 h60
  text "11" at 5760.99,1221 h60
  text "A0" at 7867,1220 h60
  text "12" at 5780.98,1121 h60
  text "13" at 7857,1120 h60
Mechanical 1:
  circle w10: c4094.49,1062.99 r78.74
  circle w10: c7992.13,1062.99 r78.74
  circle w10: c7992.13,5708.66 r78.74
  circle w10: c4094.49,5708.66 r78.74
  lines w10: 3976.38,944.88 3976.38,5826.77 8110.24,5826.77 8110.24,944.88 3976.38,944.88